# Altium PCB Z plaat.PcbDoc
Units mm, origin at the board's own origin, x right, y up, seen from the top; angles counter-clockwise.
Board outline 152.4 x 101.6 mm, 2 copper layers (Top Layer, Bottom Layer); 5 components, 3 nets, 16 pads, 17 vias.
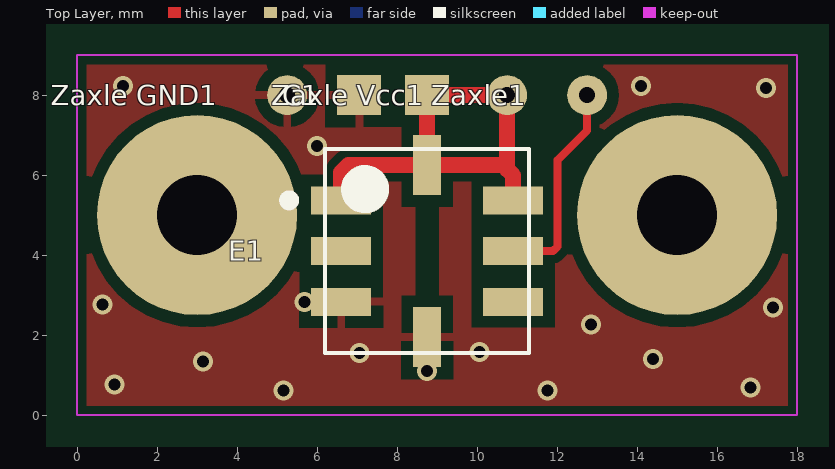
[diagram p0: Top Layer view]
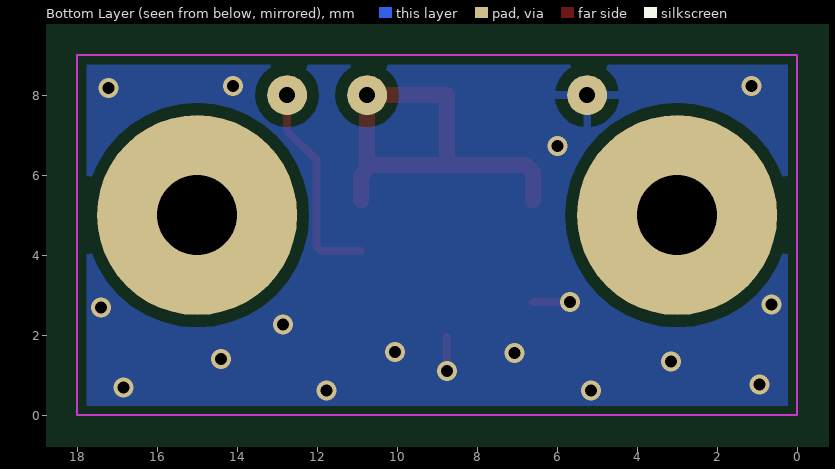
[diagram p1: Bottom Layer view, seen from below]

## Layer stack, top to bottom
Top Layer: signal copper 0.0356
Dielectric: dielectric 0.32, FR-4, Dk 4.8
Bottom Layer: signal copper 0.0356

## Board outline
-54.818,-44.932 97.582,-44.932 97.582,56.668 -54.818,56.668

## Design rules (kind name [scope] priority, off if disabled: settings)
Clearance Clearance_1 [isPad vs inPoly] p1: gap=0.3
Clearance [All] p2: gap=0.21
ComponentClearance [All] p1 off: gap=0.254 collisioncheckmode=3 verticalgap=0.254
Height [All] p1 off: minheight=0 maxheight=25.4 prefheight=12.7
PolygonConnect PolygonConnect_1 [isVia] p1: connectstyle=Direct reliefconductorwidth=0.254 reliefentries=4 polygonreliefangle="90 Angle"
PolygonConnect [not IsVia] p2: connectstyle=Relief reliefconductorwidth=0.2 reliefentries=4 polygonreliefangle="90 Angle"
RoutingVias [All] p1: holewidth=0.3 width=0.5 viastyle="Through Hole" minholewidth=0 minwidth=0 maxholewidth=10 maxwidth=10
SolderMaskExpansion [All] p1: expansion=0.102
TestPointUsage [All] p1: valid=0 allowmultiple=FALSE
Testpoint [All] p1: side=15 testpointundercomponent=TRUE minsize=1.016 maxsize=2.54 preferedsize=1.524 minholesize=0 maxholesize=1.016 preferedholesize=0.813 testpointgrid=0.025 style=1023 order=0-112345678
Width [All] p1: maxlimit=10 minlimit=0.254 preferedwidth=0.254 toplayer_minwidth=0 toplayer_prefwidth=0.2 bottomlayer_minwidth=0 bottomlayer_prefwidth=0.2 minimp=50.000000 maximp=50.000000 favimp=50.000000
17 further rules are at their usual default settings.

## Components (designator, comment, footprint, x,y, rotation, side; value= is the part's Value field where it differs from the comment)
C1 "100n" CR1608-0603 7.9,8 r0 top
E1 "AD22285" ADXL 8.75,4.1 r0 top
Zaxle1 "Socket" MW 12.75,8 r90 top
"Zaxle GND1" "Socket" MW 5.25,8 r90 top
"Zaxle Vcc1" "Socket" MW 10.75,8 r270 top

## Footprints (in the part's own frame and the unit in brackets; to place one, negate y for a bottom-side part, rotate by r counter-clockwise, add the part's x,y. Pads: shape width x height; smd on the part's side, far side on the other; paste and mask are expansions set on the pad)
ADXL [mm] "QFN, 8-Leads, Body 5,1x5,1mm (max), Pitch 1,27mm, IPC Medium Density"
  rect 1.5x0.7 smd: 1(-2.15,1.27) 2(-2.15,0) 3(-2.15,-1.27) 5(2.15,-1.27) 6(2.15,0) 7(2.15,1.27)
  rect 0.7x1.5 smd: 4(0,-2.15) 8(0,2.15)
  rect 0x2.3 smd: 9(0,0)
  silkscreen extent -3.57,-2.55 2.55,2.55
CR1608-0603 [mm] "Chip Resistor; Body 1.6 x 0.8 mm (LxW typ)"
  rect 1.1x1 smd: 1(-0.85,0) 2(0.85,0)
MW [mm]
  round 1 hole 0.4: 1(0,0)

## Part data
C1: library part CAP, "Capacitor"
E1: "Accelerometer"

## Free pads (board coordinates)
  round 5 hole 2: 1(3,5) 1(15,5)

## Via types
v1: diameter 0.5, hole 0.3, Top Layer to Bottom Layer, 17 vias

## Nets (pads, with @x,y where several pads share a name; then routed paths per layer and width w, separated by ;. In a path a pad name is that pad's centre, name@x,y a point inside that pad or via, vN(x,y) a via of type N, cw(c..) or ccw(c..) an arc to the next point about the centre after c; other vN are vias at no path point)
GND: "Zaxle GND1.1" C1.1 E1.3 E1.4 | length 1.8
  Top Layer w0.2: v1(5.679,2.83) E1.3 ; v1(8.75,1.105) E1.4
  other v1: 5.156,0.61 11.76,0.61 16.84,0.686 0.94,0.762 3.15,1.346 14.402,1.397 7.061,1.549 10.058,1.575 12.852,2.261 17.399,2.692 0.635,2.769 5.994,6.731 17.221,8.179 1.143,8.23 14.097,8.23
NetE1_6: E1.6 Zaxle1.1 | length 5.3
  Top Layer w0.2: E1.6 11.898,4.1 12.014,4.216 12.014,6.375 12.75,7.111 Zaxle1.1
VCC: "Zaxle Vcc1.1" C1.2 E1.1 E1.7 E1.8 | length 11.3
  Top Layer w0.4: E1.1 6.6,6.067 6.783,6.25 10.644,6.25 ; E1.8 C1.2 10.75,8 10.75,6.144 10.9,5.994 E1.7
pads on no net: E1.2 E1.5 E1.9

## Polygon pours and split planes (outlines as drawn)
GND on Top Layer (solid, remove dead copper): -0.533,9.627 19.914,9.627 19.914,-1.702 -1.194,-1.702
GND on Bottom Layer (solid, remove dead copper): -0.33,9.779 18.974,9.779 18.974,-1.118 -0.838,-1.118

## Keep-outs
Keep-Out Layer:
  lines w0.05: 0,0 18,0 18,9 0,9 0,0